# EAGLE board 555-ramp-generator (EAGLE 5.07)
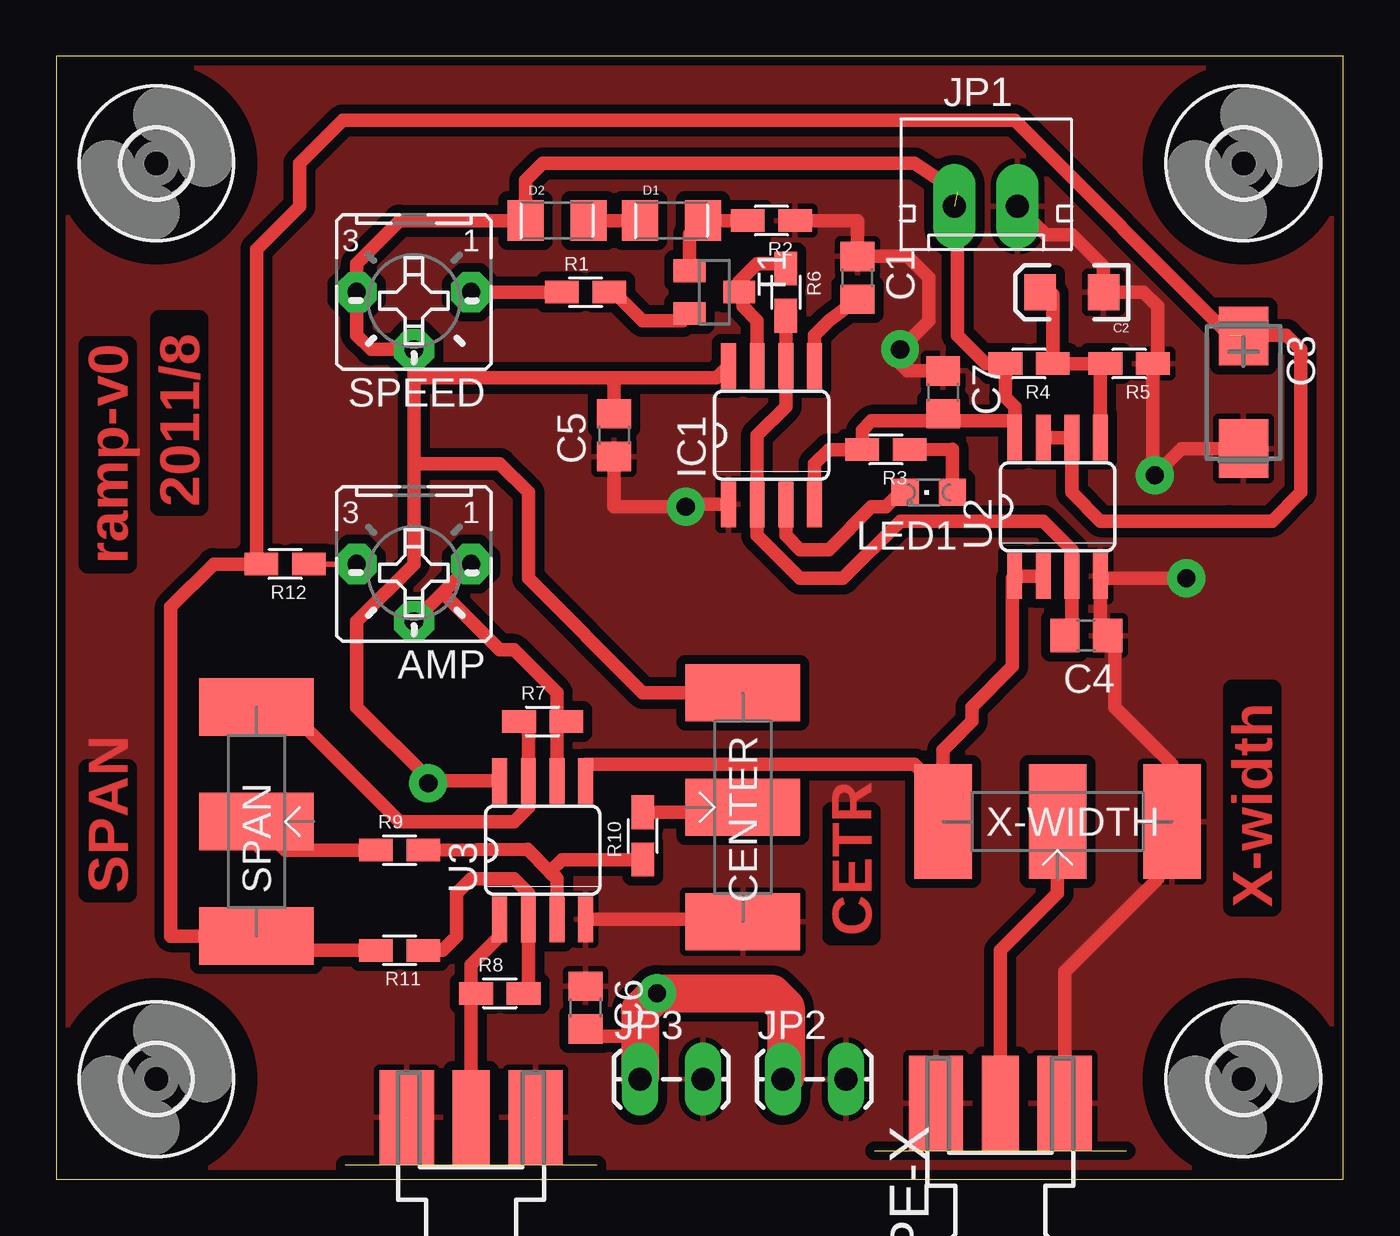
[diagram p0: board, top side]
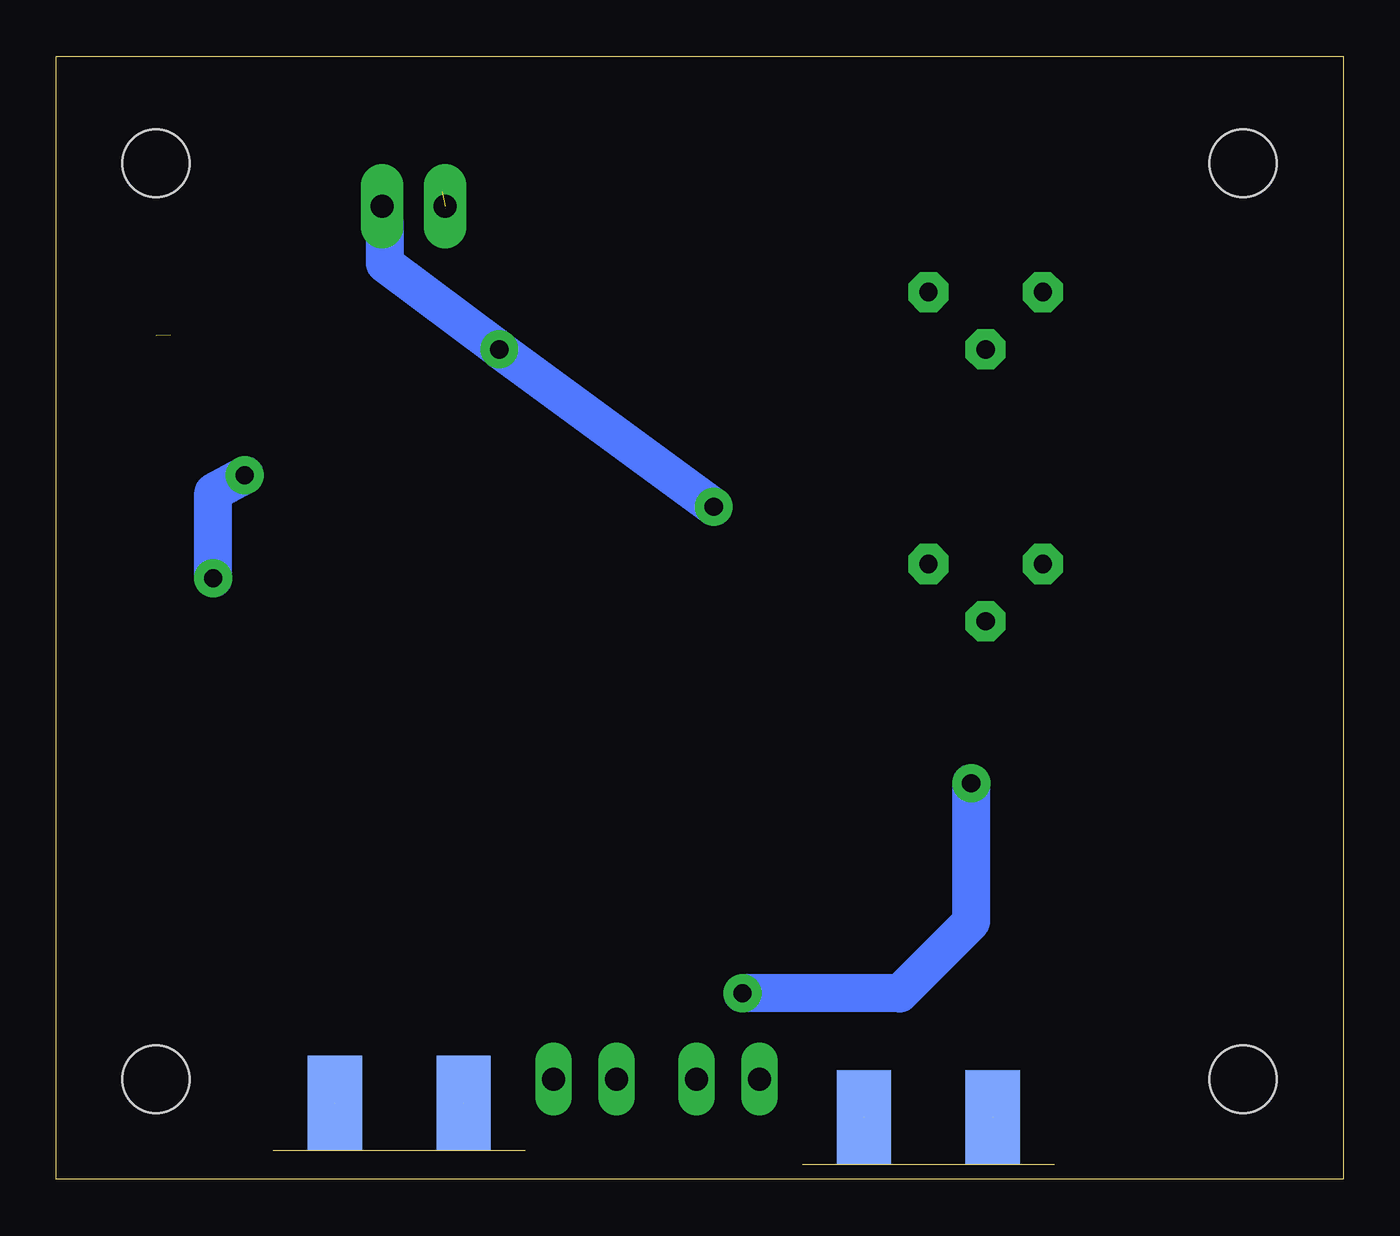
[diagram p1: board, bottom side, seen from below]

Size 57.13 x 49.84 mm. Coordinates in mm from the lower left corner, seen from the top.
Outline: 0,0 57.13,0 57.13,49.84 0,49.84 0,0
Copper layers (1*16): Top 0.035mm / dielectric 1.5mm / Bottom 0.035mm
Design rules "SparkFun": minimum track width 8mil, minimum drill 20mil, track to track 8mil, track to pad 8mil, pad to pad 8mil, via to via 8mil, smd to smd 8mil, copper to edge 10mil, drill to drill 8mil, minimum pad ring 12mil, minimum via ring 10mil, stop-mask expansion 4mil, vias tented up to drill 25mil, thermal gap 10mil

## Footprints (pad centres in the part's own frame; a part is rotated, then mirrored left to right if it is on the bottom)
B25P = drill 0.813 pad 1.778 octagon: A -2.54,0; E 2.54,0; S 0,2.54
C0805 = smd 1.3 x 1.5: 1 -0.95,0; 2 0.95,0
EIA3216 = smd 1.4 x 1.6: A 1.4,0; C -1.4,0
CT6032 = smd 2.6 x 2.2: + -2.5,0; - 2.5,0
POT-PANNEL = smd 2.54 x 5.08: A -6.35,0; E 3.81,0; S -1.27,0
1206-DIODE = smd 1.6 x 1.8: A -1.4,0; K 1.4,0
3,0 = hole 3: 0,0
SO08-DS = smd 0.66 x 2.032: 1 -1.905,-3.073; 2 -0.635,-3.073; 3 0.635,-3.073; 4 1.905,-3.073; 5 1.905,3.073; 6 0.635,3.073; 7 -0.635,3.073; 8 -1.905,3.073
XH-1X2-LONG-LOCK-V = drill 1.016 pad 1.88 long: 1 1.397,0; 2 -1.397,0
1X02_LOCK_LONGPADS = drill 1.016 long: 1 -0.127,0; 2 2.667,0
CHIPLED_0805 = smd 1.2 x 1.2: A 0,-1.05; C 0,1.05
R0805W = smd 1.5 x 1: 1 -1.052,0; 2 1.052,0
SMA-KE = smd 4.191 x 1.651: 1 2.115,0 | smd 4.191 x 2.413: G@1 2.115,2.86; G@2 2.115,-2.86 | smd 4.191 x 2.413 bottom: G@3 2.115,2.86; G@4 2.115,-2.86
SOT23-BEC = smd 1 x 1.4: B -0.95,-1.1; C 0,1.1; E 0.95,-1.1
SO08 = smd 0.66 x 2.032: 1 -1.905,-3.073; 2 -0.635,-3.073; 3 0.635,-3.073; 4 1.905,-3.073; 5 1.905,3.073; 6 0.635,3.073; 7 -0.635,3.073; 8 -1.905,3.073

## Placement (x,y rotation side)
AMP  10K  [B25P]  15.88,27.3 180 top
C1  0.1  [C0805]  35.56,40.01 270 top
C2  10uF  [EIA3216]  45.09,39.37 180 top
C3  100uF  [CT6032]  52.7,34.92 270 top
C4  2uF  [C0805]  45.72,24.13 180 top
C5  0.1  [C0805]  24.77,33.02 90 top
C6  0.1  [C0805]  23.5,7.62 270 top
C7  0.1  [C0805]  39.37,34.92 270 top
CENTER  10k  [POT-PANNEL]  30.48,15.24 270 top
D1  1n4148  [1206-DIODE]  27.3,42.55 0 top
D2  1n4148  [1206-DIODE]  22.23,42.55 0 top
H1  MOUNT-HOLE3.0  [3,0]  4.45,45.09 0 top
H2  MOUNT-HOLE3.0  [3,0]  52.7,4.45 0 top
H3  MOUNT-HOLE3.0  [3,0]  52.7,45.09 0 top
H4  MOUNT-HOLE3.0  [3,0]  4.45,4.45 0 top
IC1  NE555SOP  [SO08-DS]  31.75,33.02 0 top
JP1  [XH-1X2-LONG-LOCK-V]  41.27,43.18 180 top
JP2  pout1  [1X02_LOCK_LONGPADS]  32.38,4.45 0 top
JP3  pout2  [1X02_LOCK_LONGPADS]  26.04,4.45 0 top
LED1  green  [CHIPLED_0805]  38.73,30.48 90 top
R1  1.2K  [R0805W]  23.5,39.37 0 top
R2  4.7k  [R0805W]  31.75,42.55 180 top
R3  [R0805W]  36.83,32.38 180 top
R4  47K  [R0805W]  43.18,36.2 180 top
R5  47K  [R0805W]  47.62,36.2 180 top
R6  100R  [R0805W]  32.38,39.37 270 top
R7  47K  [R0805W]  21.59,20.32 0 top
R8  100K  [R0805W]  19.68,8.26 0 top
R9  100K  [R0805W]  15.24,14.61 0 top
R10  150K  [R0805W]  26.04,15.24 90 top
R11  100K  [R0805W]  15.24,10.16 180 top
R12  47K  [R0805W]  10.16,27.3 180 top
SCOPE-X  SMA--KE  [SMA-KE]  41.91,1.27 90 top
SPAN  10k  [POT-PANNEL]  8.89,17.14 90 top
SPEED  10K  [B25P]  15.88,39.37 180 top
T1  [SOT23-BEC]  29.21,39.37 270 top
U2  LM358  [SO08]  44.45,29.84 0 top
U3  LM358  [SO08]  21.59,14.61 0 top
VCO  SMA--KE  [SMA-KE]  18.41,0.64 90 top
X-WIDTH  10k  [POT-PANNEL]  45.72,15.88 0 top

## Library data of the parts
AMP C1-C7 CENTER D1 D2 IC1 JP1-JP3 LED1 R1-R12 SPAN SPEED T1 U2 U3 X-WIDTH = digital-toy
H1-H4 = holes
SCOPE-X VCO = dtoy-RF

## Nets
GND: C1.1 C2.C C3.- C4.1 C5.1 C6.1 C7.1 CENTER.E IC1.1 JP1.2 JP2.2 JP3.2 R2.1 R5.1 SCOPE-X.G@1 SCOPE-X.G@2 SCOPE-X.G@3 SCOPE-X.G@4 U2.4 U3.4 VCO.G@1 VCO.G@2 VCO.G@3 VCO.G@4 X-WIDTH.E
N$1: IC1.3 LED1.C
N$2: D1.K R2.2 T1.B
N$3: LED1.A R3.1
N$4: C1.2 IC1.5
N$5: D1.A D2.K
N$6: R1.2 T1.E
N$7: R1.1 SPEED.A
N$8: C4.2 IC1.2 IC1.6 R6.2 U2.3
N$9: IC1.7 R6.1 T1.C
N$10: C2.A R4.1 R5.2 U2.5
N$12: SCOPE-X.1 X-WIDTH.S
N$13: U2.1 U2.2 U3.5 X-WIDTH.A
N$14: AMP.A AMP.S R7.2 U3.6
N$15: CENTER.S R10.2
N$16: R7.1 SPAN.E U3.7
N$17: R9.2 R10.1 U3.3
N$18: R8.1 U3.1 VCO.1
N$19: R9.1 SPAN.S
N$21: R8.2 R11.1 U3.2
N$22: AMP.E R12.1
REF: C3.+ R11.2 R12.2 SPAN.A U2.6 U2.7
VCC: C5.2 C6.2 C7.2 CENTER.A D2.A IC1.4 IC1.8 JP1.1 JP2.1 JP3.1 R3.2 R4.2 SPEED.E SPEED.S U2.8 U3.8

## Tracks (layer width: path | path; a pad name or v marks a point on that pad's centre or on a via)
GND  (via drill 0.81 pad 1.68)  (4 unrouted)
  Top 0.254: 30.38,11.53 CENTER.E | R5.1 48.9,36.41 | C4.1 46.35,24.45 | X-WIDTH.E 49.25,16.34 48.58,17.46
  Top 0.406: v48.77,31.25 48.68,31.33
  Top 0.61: U3.4 30.38,11.53 | 48.9,36.41 48.9,38.73 48.26,39.37 C2.C 46.48,40.51 45.09,41.91 43.94,41.91 JP1.2 | SCOPE-X.G@4 44.77,9.21 48.9,13.34 X-WIDTH.E | 46.35,24.45 U2.4 46.46,26.67 v50.16,26.67 | C4.1 46.99,24.13 46.99,20.95 49.53,18.41 49.53,16.62 49.25,16.34 | R2.1 35.56,42.55 C1.1 37.78,40.95 38.73,40.01 38.73,38.1 v37.47,36.83 37.47,36.2 37.78,35.88 C7.1 | C3.- 49.95,32.42 v48.77,31.25 | 48.68,31.33 R5.1 | C5.1 24.77,29.84 v27.94,29.84 27.94,29.95 IC1.1
  Bottom 0.61: JP1.2 42.55,42.42
  Bottom 1.676: 42.55,42.42 42.55,40.64 v37.47,36.83 v27.94,29.84 | v48.77,31.25 50.16,30.48 v50.16,26.67
  pour Top (isolate 0.406): 5.08,55.24 54.61,54.61 62.23,44.45 60.96,5.71 58.42,-2.54 8.89,-4.45 -5.08,-0.64 -5.08,53.34
N$1
  Top 0.406: 37.47,30.48 LED1.C
  Top 0.61: IC1.3 32.38,28.57 33.02,27.94 34.29,27.94 36.2,29.84 36.83,29.84 37.47,30.48
N$2
  Top 0.254: 28.11,41.95 D1.K
  Top 0.61: T1.B 28.11,41.95 | D1.K R2.2
N$3
  Top 0.61: LED1.A 39.78,32.39 R3.1
N$4
  Top 0.61: IC1.5 33.66,37.47 34.29,38.1 C1.2
N$5
  Top 0.61: D2.K D1.A
N$6
  Top 0.254: R1.2 24.77,39.37
  Top 0.61: 24.77,39.37 26.04,38.1 27.79,38.1 T1.E
N$7
  Top 0.61: SPEED.A R1.1
N$8
  Top 0.254: 45.09,24.45 C4.2
  Top 0.61: 45.09,24.45 U2.3 45.09,27.94 43.81,29.21 37.47,29.21 34.92,26.67 33.02,26.67 31.11,28.57 IC1.2 31.11,33.02 32.38,34.29 IC1.6 R6.2
N$9
  Top 0.254: 32.17,40.64 R6.1
  Top 0.61: 32.17,40.64 31.11,40.64 30.31,39.84 T1.C 30.48,39.2 30.48,38.73 31.11,38.1 IC1.7
N$10
  Top 0.254: 46.35,35.98 R5.2 | 44.23,39.28 C2.A
  Top 0.61: U2.5 46.35,35.98 | R5.2 R4.1 44.23,39.28
N$12
  Top 0.61: SCOPE-X.1 41.91,10.16 44.45,12.7 X-WIDTH.S
N$13
  Top 0.254: 42.44,26.67 U2.1 | X-WIDTH.A 39.37,17.14 39.05,17.46 39.37,17.78
  Top 0.61: U2.1 U2.2 | U3.5 23.5,18.41 38.1,18.41 39.05,17.46 | 42.44,26.67 42.44,22.76 40.64,20.95 40.64,20.32 39.37,19.05 39.37,17.78
N$14
  Top 0.254: 22.23,19.9 R7.2
  Top 0.61: 17.14,26.04 AMP.S | 17.14,26.04 AMP.A | U3.6 22.23,19.9 22.23,21.59 20.32,23.5 19.68,23.5 17.14,26.04
N$15
  Top 0.254: 30.26,16.29 CENTER.S
  Top 0.61: R10.2 30.26,16.29
N$16
  Top 0.254: 20.95,19.9 R7.1 | 20.95,16.51 U3.7
  Top 0.61: U3.7 20.95,19.9 | 20.95,16.51 20.32,15.88 15.24,15.88 10.16,20.95 SPAN.E
N$17
  Top 0.61: R9.2 20.92,14.64 21.91,13.65 | 21.91,13.65 22.23,13.34 U3.3 | R10.1 22.44,14.19 21.91,13.65
N$18
  Top 0.254: 18.41,8.47 R8.1 18.41,8.04
  Top 0.61: U3.1 19.68,10.79 18.41,9.53 18.41,8.47 | VCO.1 18.41,8.04
N$19
  Top 0.254: 8.89,14.61 SPAN.S
  Top 0.61: R9.1 10.16,14.61 SPAN.S
N$21
  Top 0.254: 20.95,8.47 R8.2
  Top 0.61: 20.95,8.47 U3.2 20.95,12.7 20.32,13.34 18.41,13.34 17.78,12.7 17.78,10.79 17.14,10.16 R11.1
N$22
  Top 0.254: R12.1 AMP.E
REF  (1 unrouted)
  Top 0.406: 52.74,37.47 C3.+
  Top 0.61: U2.7 U2.6 45.09,30.48 46.35,29.21 52.07,29.21 53.98,29.21 55.24,30.48 55.24,36.83 54.61,37.47 52.74,37.47 | 52.07,37.47 42.55,46.99 12.7,46.99 10.79,45.09 10.79,43.18 8.89,41.27 8.89,27.52 R12.2 6.99,27.3 5.08,25.4 5.08,10.79 SPAN.A 9.53,10.16 R11.2
VCC  (via drill 0.81 pad 1.68)  (1 unrouted)
  Top 0.254: U2.8 42.44,33.66
  Top 0.61: IC1.4 33.66,31.75 34.29,32.38 R3.2 35.78,33.24 36.2,33.66 39.05,33.66 C7.2 39.37,33.66 42.44,33.66 | 16.61,17.68 U3.8 | 16.61,17.68 13.34,20.95 13.34,24.77 15.88,27.3 15.88,31.75 | 15.88,31.75 15.88,35.56 | 15.88,35.56 SPEED.S 13.97,36.83 13.34,37.47 SPEED.E 13.34,40.64 15.24,42.55 D2.A 20.83,44.33 21.59,45.09 38.1,45.09 40.01,43.81 40.01,37.47 41.27,36.2 R4.2 42.13,34.71 42.55,34.29 U2.8 | IC1.8 29.31,35.56 24.77,35.56 | 15.88,35.56 24.77,35.56 | 24.77,35.56 C5.2 | 32.38,4.57 JP2.1 | v16.51,17.58 16.61,17.68 | C6.2 23.5,6.35 25.91,6.35 | CENTER.A 26.04,21.59 20.95,26.67 20.95,30.48 19.68,31.75 15.88,31.75
  Top 1.676: JP3.1 25.91,6.35 25.91,7.49 v26.67,8.26 31.75,8.26 32.38,7.62 32.38,4.57
  Bottom 1.676: v26.67,8.26 19.68,8.26 16.51,11.43 v16.51,17.58

## Text on the board
Top: 2011/8 | ramp-v0 | SPAN | X-width | CETR